# Altium PCB QVGA.PcbDoc
Units mil, origin at the board's own origin, x right, y up, seen from the top; angles counter-clockwise.
Board outline 2285 x 2125 mil, 2 copper layers (Top Layer, Bottom Layer); 5 components, 22 nets, 74 pads, 8 vias.
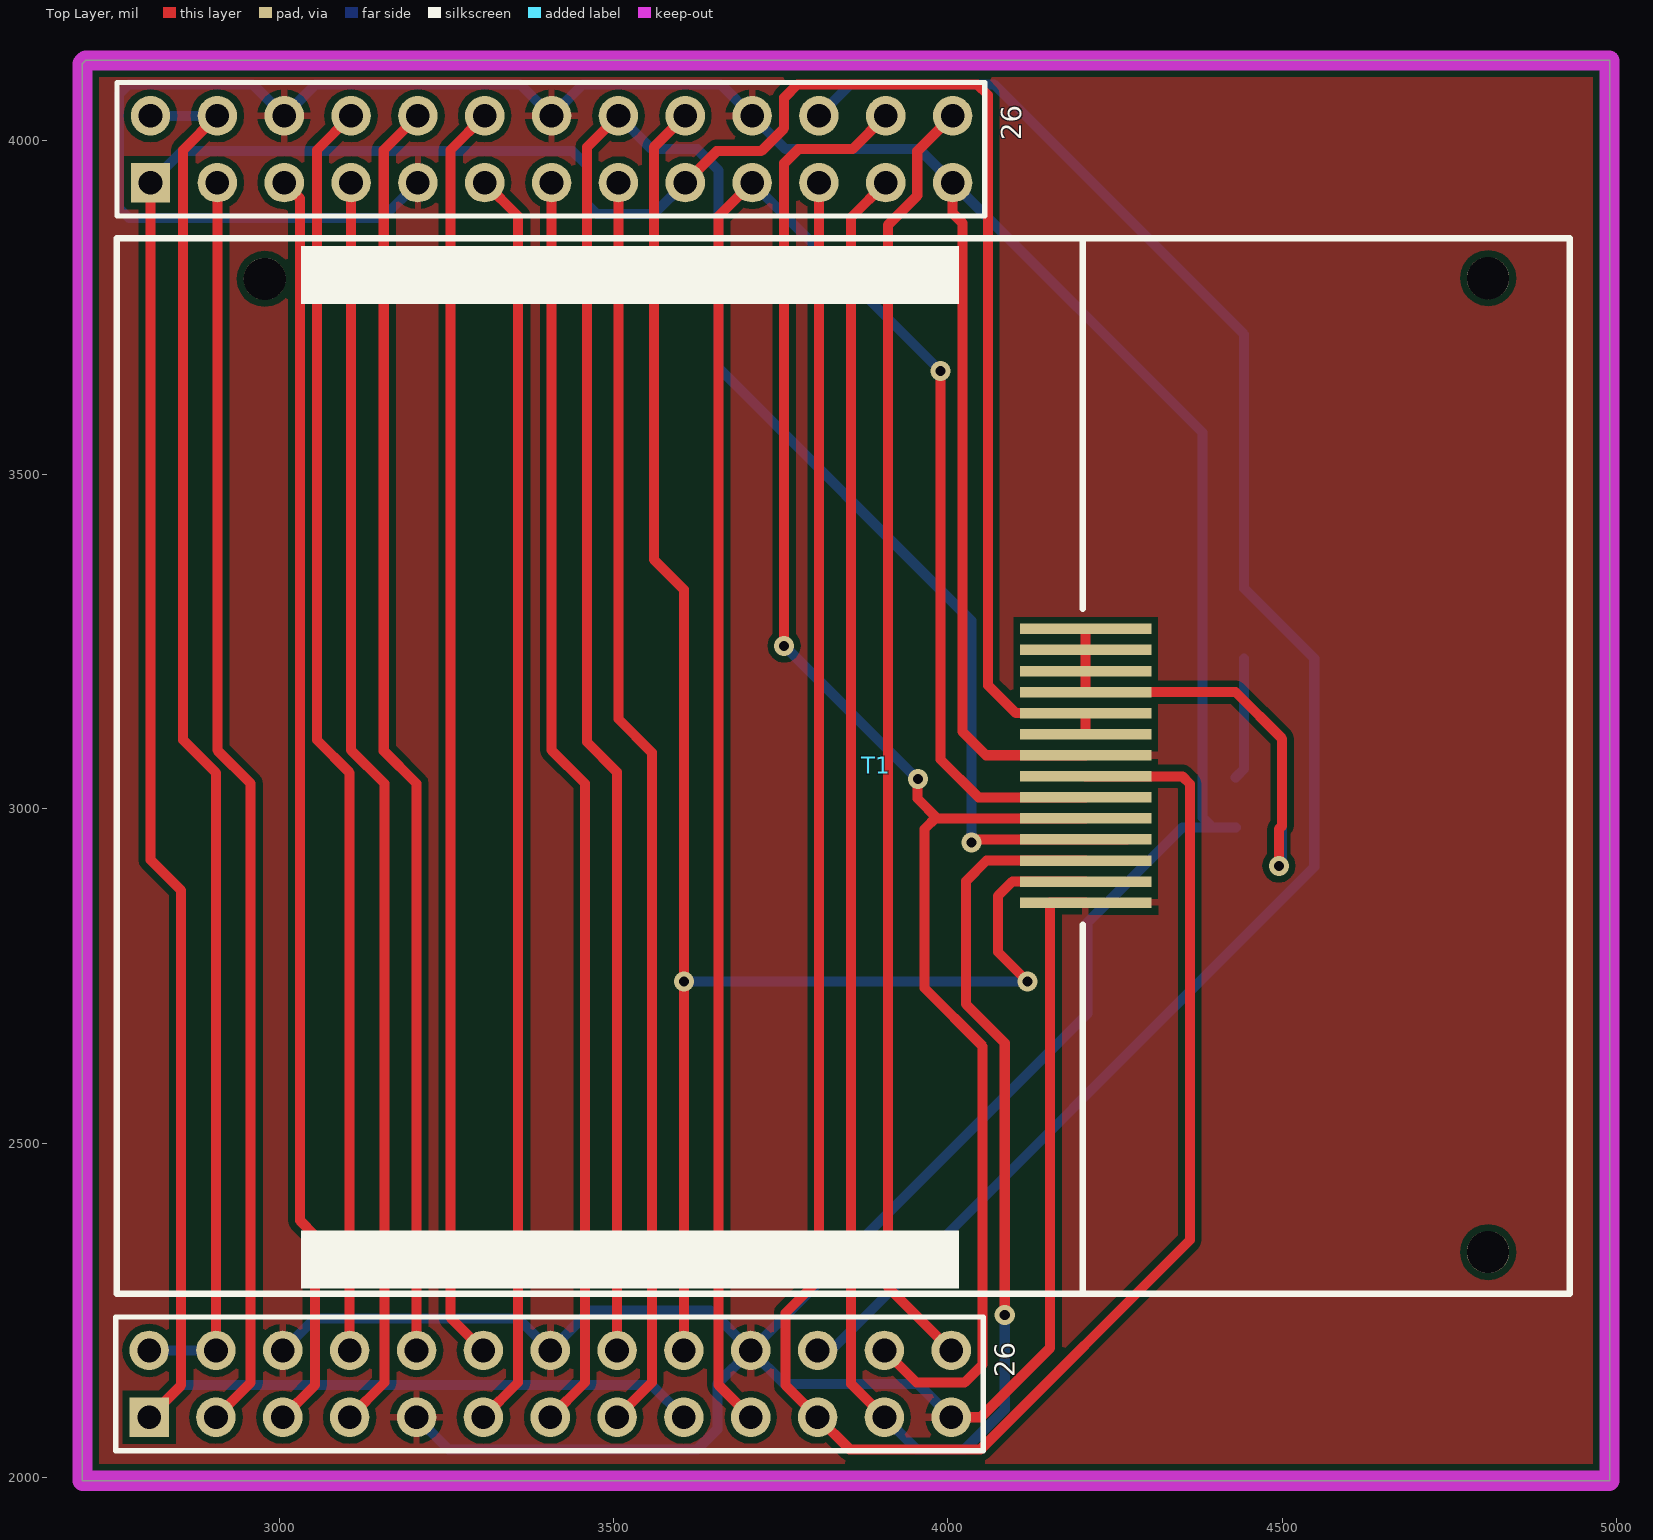
[diagram p0: Top Layer view]
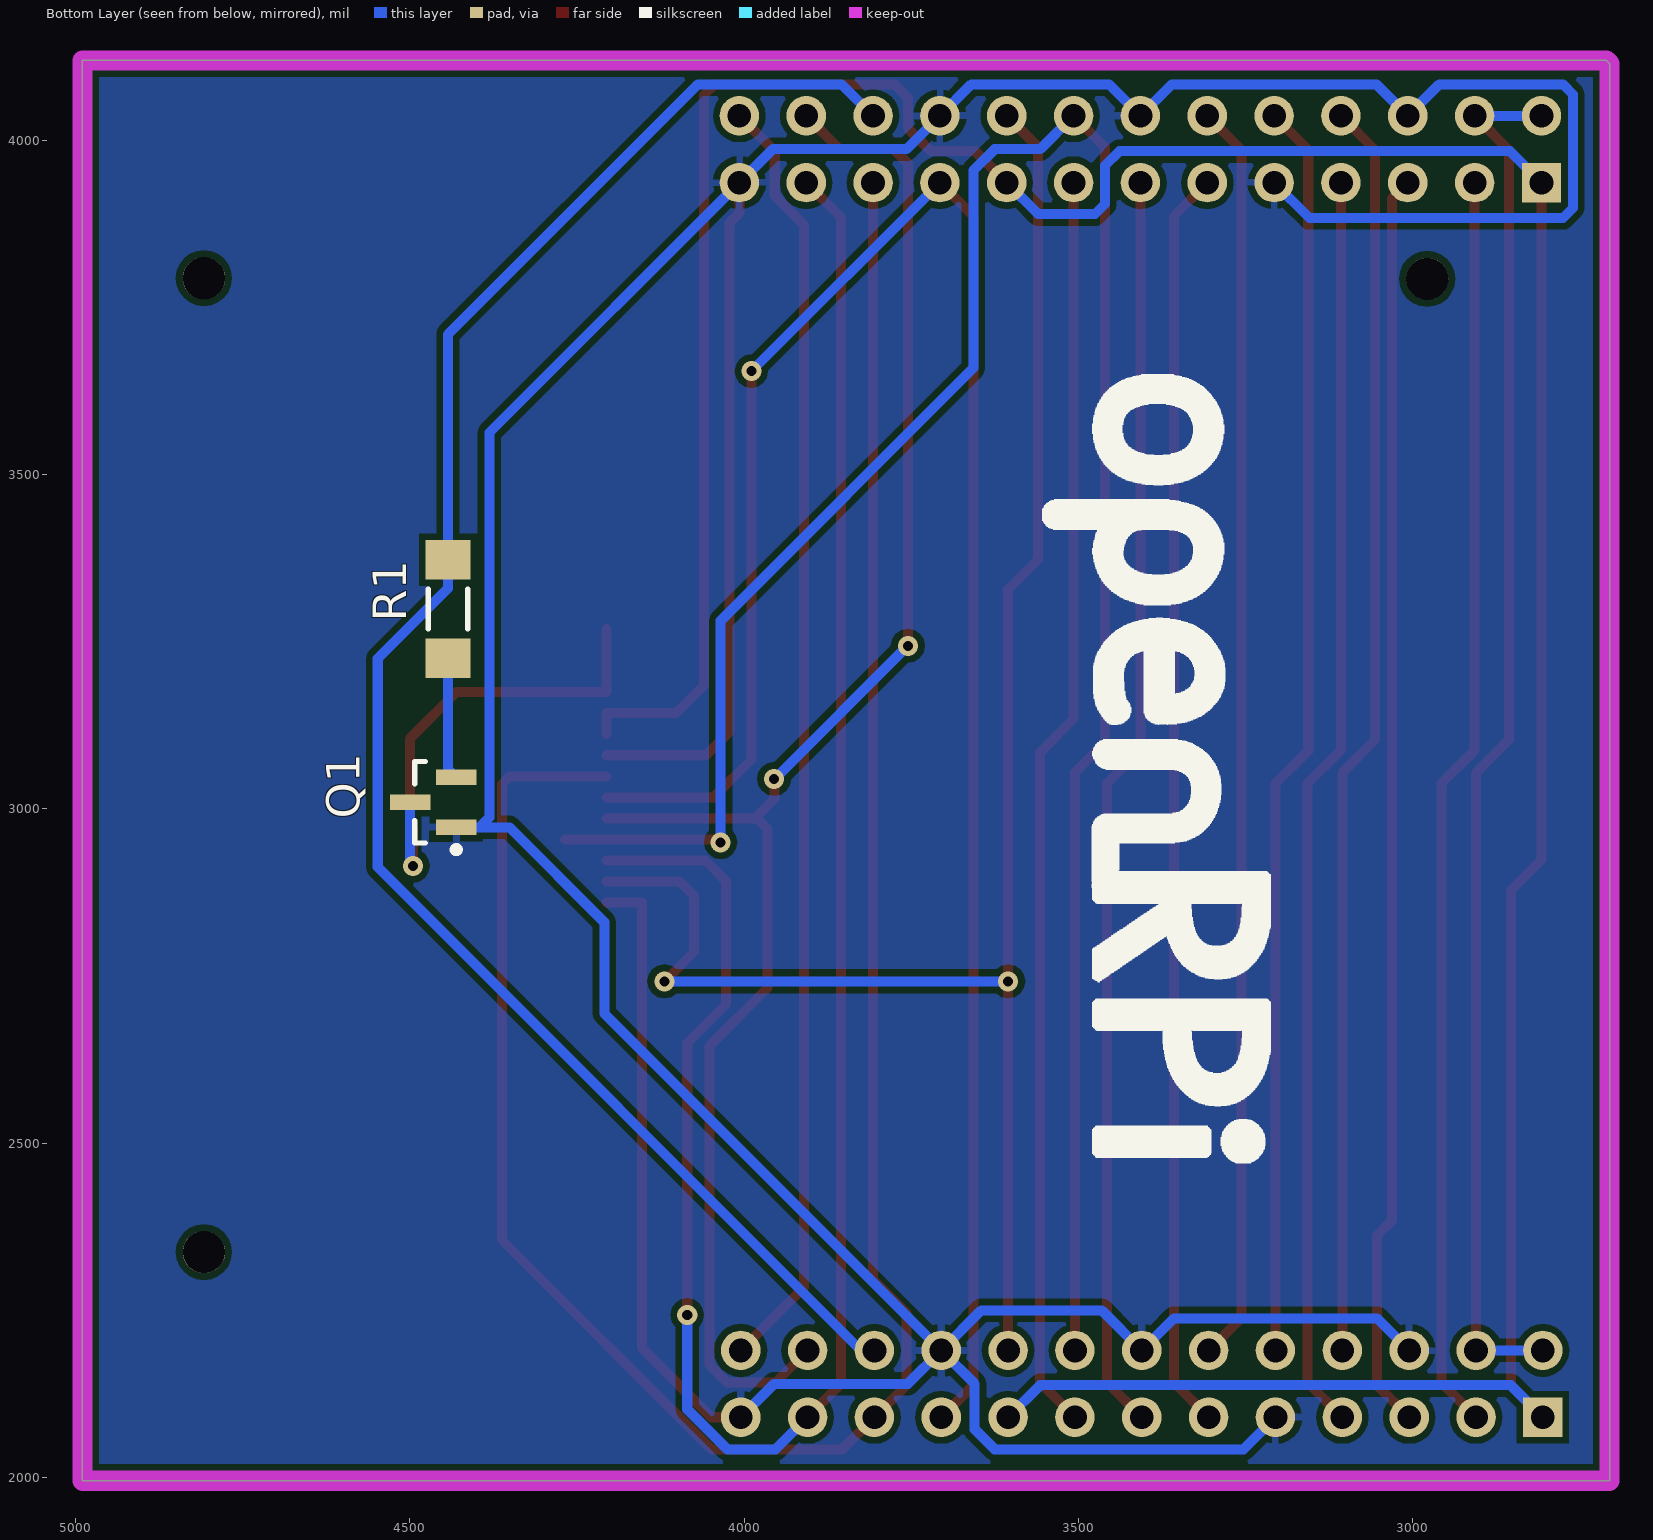
[diagram p1: Bottom Layer view, seen from below]

## Layer stack, top to bottom
Top Layer: signal copper 1.4
Dielectric: dielectric 12.6, FR-4, Dk 4.8
Bottom Layer: signal copper 1.4

## Board outline
2705,1995 4990,1995 4990,4120 2710,4120 2705,4115

## Design rules (kind name [scope] priority, off if disabled: settings)
Clearance [All] p1: gap=10
ComponentClearance [All] p1 off: gap=10 collisioncheckmode=3 verticalgap=10 showdistances=FALSE
MinimumSolderMaskSliver [All] p1: minsoldermaskwidth=5
PolygonConnect [All] p1: connectstyle=Relief reliefconductorwidth=10 reliefentries=4 polygonreliefangle="90 Angle" airgapwidth=10
RoutingVias RoutingVias_nonet [InNet('No Net')] p1: holewidth=28 width=100 viastyle="Through Hole" minholewidth=28 minwidth=100 maxholewidth=28 maxwidth=100
RoutingVias [All] p2: holewidth=15 width=30 viastyle="Through Hole" minholewidth=15 minwidth=30 maxholewidth=15 maxwidth=30
SilkToSilkClearance [All] p1: silktosilkclearance=6
SilkToSolderMaskClearance [IsPad] p1: minsilkscreentomaskgap=6 clearancetoexposedcopper=TRUE
SolderMaskExpansion [All] p1: expansion=4
Width [All] p1: maxlimit=15 minlimit=15 preferedwidth=15
24 further rules are at their usual default settings.

## Components (designator, comment, footprint, x,y, rotation, side; value= is the part's Value field where it differs from the comment)
26 "PIN" GPIO13x2 2805,2090 r0 top (schematic designator P2)
26 "raspberry_b" GPIO13x2 2807.05,3936.93 r0 top (schematic designator P1)
Q1 "S8050" "SOT23 - duplicate" 4465,3010 r0 bottom
R1 "1K" 1206 4410,3405 r270 bottom
T1 "TM022HDH26" TM022HDH26 4930,2275 r90 top

## Footprints (in the part's own frame and the unit in brackets; to place one, negate y for a bottom-side part, rotate by r counter-clockwise, add the part's x,y. Pads: shape width x height; smd on the part's side, far side on the other; paste and mask are expansions set on the pad)
1206 [mm]
  rect 1.5x1.7 smd: 1(0.817,-0.838) 2(4.567,-0.838)
  silkscreen extent 1.94,-1.59 3.44,-0.09, body extent 1.09,-1.64 4.29,-0.04, height 1.1
GPIO13x2 [mm]
  rect 1.5x1.5 hole 0.9: 1(0,0)
  round 1.5 hole 0.9: 2(0,2.54) 3(2.54,0) 4(2.54,2.54) 5(5.08,0) 6(5.08,2.54) 7(7.62,0) 8(7.62,2.54) 9(10.16,0) 10(10.16,2.54) 11(12.7,0) 12(12.7,2.54) 13(15.24,0) 14(15.24,2.54) 15(17.78,0) 16(17.78,2.54) 17(20.32,0) 18(20.32,2.54) 19(22.86,0) 20(22.86,2.54) 21(25.4,0) 22(25.4,2.54) 23(27.94,0) 24(27.94,2.54) 25(30.48,0) 26(30.48,2.54)
  silkscreen extent -1.27,-1.27 31.7,3.81
"SOT23 - duplicate" [mm]
  rect 1.55x0.6 smd: 1(-0.875,0.95) 2(-0.875,-0.95) 3(0.875,0)
  silkscreen extent -1,-1.55 0.7,1.92, body extent -0.7,-1.52 0.7,1.53, height 1.1
TM022HDH26 [mm]
  round 1.6 hole 1.6 unplated: 0(38.583,3.099) 1(38.557,49.581) 2(1.575,3.099)
  rect 0.4x5 smd: 1(14.856,18.39) 2(15.656,18.39) 3(16.456,18.39) 4(17.256,18.39) 5(18.056,18.39) 6(18.856,18.39) 7(19.656,18.39) 8(20.456,18.39) 9(21.256,18.39) 10(22.056,18.39) 11(22.856,18.39) 12(23.656,18.39) 13(24.456,18.39) 14(25.256,18.39)
  silkscreen extent 0,0 40.1,55.2

## Part data
26: library part raspberry_b
R1: library part register
T1: "2.2寸无触摸"

## Via types
v1: diameter 30, hole 15, Top Layer to Bottom Layer, 8 vias

## Nets (pads, with @x,y where several pads share a name; then routed paths per layer and width w, separated by ;. In a path a pad name is that pad's centre, name@x,y a point inside that pad or via, vN(x,y) a via of type N, cw(c..) or ccw(c..) an arc to the next point about the centre after c; other vN are vias at no path point)
3.3V: 26.1 26.17 T1.9 T1.10 | length 5262.3
  Top Layer w15: 26.1@2805,2090 2853,2138 2853,2878 2807.05,2923.95 26.1@2807.05,3936.93 ; 26.17@3607.05,3936.93 3654.12,3984 3720.63,3984 3755,4018.37 3755,4064 3775,4084 4044,4084 4060,4068 4060,3185 4101.67,3143.33 T1.10 T1.9
  Bottom Layer w15: 26.1@2805,2090 2853,2138 3557,2138 26.17@3605,2090 ; 26.1@2807.05,3936.93 2854.12,3984 3438.52,3984 3460.02,3962.5 3460.02,3904.88 3475,3889.9 3560.02,3889.9 26.17@3607.05,3936.93
5V: 26.2 26.4 | length 2088.4
  Top Layer w15: 26.4@2905,2190 2905,3054 2856,3103 2856,3985.88 26.4@2907.05,4036.93
  Bottom Layer w15: 26.2@2805,2190 26.4@2905,2190 ; 26.2@2807.05,4036.93 26.4@2907.05,4036.93
GND: 26.6 26.9 26.14 26.20 26.25 Q1.1 T1.1@4206,2859.87 T1.8 | length 7980.6
  Top Layer w15: 26.25@4005,2090 4049.06,2090 4153,2193.94 4153,2859.87 T1.1@4206,2859.87 ; 26.25@4007.05,3936.93 4007.05,3891.29 4021.5,3876.83 4021.5,3115.84 4057,3080.34 T1.8
  Bottom Layer w15: 26.6@3005,2190 3053,2238 3357,2238 3405,2190 3465,2250 3645,2250 26.20@3705,2190 ; 26.9@3205,2090 3253,2042 3625,2042 3655,2072 3655,2140 26.20@3705,2190 ; 26.9@3207.05,3936.93 3154.12,3884 2775,3884 2760,3899 2760,4069 2775,4084 2959.98,4084 3007.05,4036.93 3054.12,4084 3359.98,4084 3407.05,4036.93 3454.12,4084 3659.98,4084 3707.05,4036.93 3756.98,3987 3956.98,3987 4007.05,3936.93 4381,3562.98 4381,2987.5 4395.9,2972.6 ; 26.25@4005,2090 3955,2140 3755,2140 26.20@3705,2190 ; Q1.1 4395.9,2972.6 ; 26.20@3705,2190 4209,2694 4209,2830.56 4351.04,2972.6 4395.9,2972.6
GPIO_04: 26.7 | length 1889.2
  Top Layer w15: 26.7@3105,2090 3157,2142 3157,3038 3107.05,3087.95 26.7@3107.05,3936.93
GPIO_17: 26.11 | length 1889.2
  Top Layer w15: 26.11@3305,2090 3357,2142 3357,3886.98 26.11@3307.05,3936.93
GPIO_18: 26.12 | length 1888.4
  Top Layer w15: 26.12@3305,2190 3256,2239 3256,3985.88 26.12@3307.05,4036.93
GPIO_22: 26.15 | length 1889.2
  Top Layer w15: 26.15@3505,2090 3557,2142 3557,3084.54 3507.05,3134.49 26.15@3507.05,3936.93
GPIO_27: 26.13 | length 1889.2
  Top Layer w15: 26.13@3405,2090 3457,2142 3457,3038 3407.05,3087.95 26.13@3407.05,3936.93
I2C0_SCL: 26.5 | length 1885.8
  Top Layer w15: 26.5@3005,2090 3053,2138 3053,2362 3031,2384 3031,3912.98 26.5@3007.05,3936.93
I2C0_SDA: 26.3 | length 1889.2
  Top Layer w15: 26.3@2905,2090 2957,2142 2957,3038 2907.05,3087.95 26.3@2907.05,3936.93
LCD_DC: 26.16 T1.4 | length 3465.1
  Top Layer w15: 26.16@3505,2190 3505,3055 3460,3100 3460,3989.88 26.16@3507.05,4036.93 ; v1(4035,2950) 4039.35,2954.35 T1.4 T1.4@4267.8,2954.35
  Bottom Layer w15: 26.16@3507.05,4036.93 3556.98,3987 3625,3987 3657,3955 3657,3659.56 4035,3281.56 v1(4035,2950)
LCD_LED: 26.22 R1.1 | length 2693.3
  Bottom Layer w15: 26.22@3805,2190 3825,2190 4548,2913 4548,3225 4443,3330 R1.1 4443,3710 4069,4084 3854.12,4084 26.22@3807.05,4036.93
LCD_Q_CS: 26.24 T1.5 | length 2515.1
  Top Layer w15: v1(3755,3244) 3755,3966 3776,3987 3857.12,3987 26.24@3907.05,4036.93 ; 26.24@3905,2190 3953,2142 4025,2142 4052.03,2169.03 4052.03,2645 3965,2732.03 3965,2970 3982.5,2987.5 ; v1@3954.5,3044.5 3954.5,3015.5 3984.15,2985.85 4105.85,2985.85 ; T1.5@4109,2985.85 T1.5
  Bottom Layer w15: v1(3755,3244) v1@3954.5,3044.5
  other v1: 3955,3045
LCD_RESET: 26.18 T1.2@4206,2891.36 | length 2685.1
  Top Layer w15: 26.18@3605,2190 v1(3605,2742) 3605,3328 3560,3373 3560,3989.88 26.18@3607.05,4036.93 ; v1(4119,2742) 4075,2786 4075,2870 4096.36,2891.36 T1.2@4206,2891.36
  Bottom Layer w15: v1(3605,2742) v1(4119,2742)
LCD_SCLK: 26.23 T1.3 | length 3119.7
  Top Layer w15: 26.23@3905,2090 3855,2140 3855,3884.88 26.23@3907.05,3936.93 ; v1(4085,2243) 4085,2650 4027.03,2707.97 4027.03,2892.03 4057.86,2922.86 T1.3
  Bottom Layer w15: 26.23@3905,2090 3953,2042 4025,2042 4085,2102 v1(4085,2243)
LCD_SDI: 26.19 T1.6 | length 3107.7
  Top Layer w15: 26.19@3705,2090 3657,2138 3657,3886.88 26.19@3707.05,3936.93 ; v1(3989,3654.98) 3989,3074 4045.65,3017.35 T1.6
  Bottom Layer w15: 26.19@3707.05,3936.93 v1(3989,3654.98)
LCD_SDO: 26.21 T1.7 | length 3437.3
  Top Layer w15: 26.21@3807.05,3936.93 3807.05,2296.05 3757,2246 3757,2138 3805,2090 3853,2042 4049,2042 4362,2355 4362,3037.5 4350.66,3048.84 T1.7
LEDK: Q1.3 T1.11 T1.12 T1.13 T1.14 | length 707.1
  Top Layer w15: T1.14 T1.13 T1.12 T1.11 4430.17,3174.83 4500,3105 4500,2974.83 4495,2969.83 v1(4495,2915)
  Bottom Layer w15: v1(4495,2915) 4500,2920 4500,3010 Q1.3
NetQ1_2: Q1.2 R1.2 | length 182.9
  Bottom Layer w15: Q1.2 4443,3059.85 R1.2
SPI0_CE1: 26.26 | length 1926.5
  Top Layer w15: 26.26@4005,2190 3910,2285 3910,3873.38 3954.08,3917.45 3954.08,3983.96 26.26@4007.05,4036.93
UART0_RXD: 26.10 | length 1888.4
  Top Layer w15: 26.10@3205,2190 3205,3038 3156,3087 3156,3985.88 26.10@3207.05,4036.93
UART0_TXD: 26.8 | length 1888.4
  Top Layer w15: 26.8@3105,2190 3105,3054 3056,3103 3056,3985.88 26.8@3107.05,4036.93
pads on no net: T1.0 T1.1@2978,3793 T1.2@4808,2337

## Polygon pours and split planes (outlines as drawn)
GND on Top Layer "Bottom Layer-No Net" (solid, remove dead copper, pour order 4): 2705,4115 2710,4120 4990,4120 4990,1995 2705,1995
GND on Bottom Layer "Bottom Layer-No Net" (solid, remove dead copper, pour order 6): 2710,4120 4990,4120 4990,1995 2705,1995

## Keep-outs
Keep-Out Layer:
  the board outline again, w30

## Silkscreen, mask and mechanical layers (free items; w line width, h text height)
Bottom Overlay:
  drawing of 2265 lines, arcs and shapes, not listed

## Dimensions
2705,4115 to 4990,4120 on Top Overlay
4990,4120 to 4990,1995 on Top Overlay